# Altium PCB SolarPanelsV2_1.PcbDoc
Units mm, origin at the board's own origin, x right, y up, seen from the top; angles counter-clockwise.
Board outline 321.5 x 80 mm, 2 copper layers (Top Layer, Bottom Layer); 7 components, 5 nets, 37 pads, 25 vias.
Unrouted connection lines stored in the file: 3.
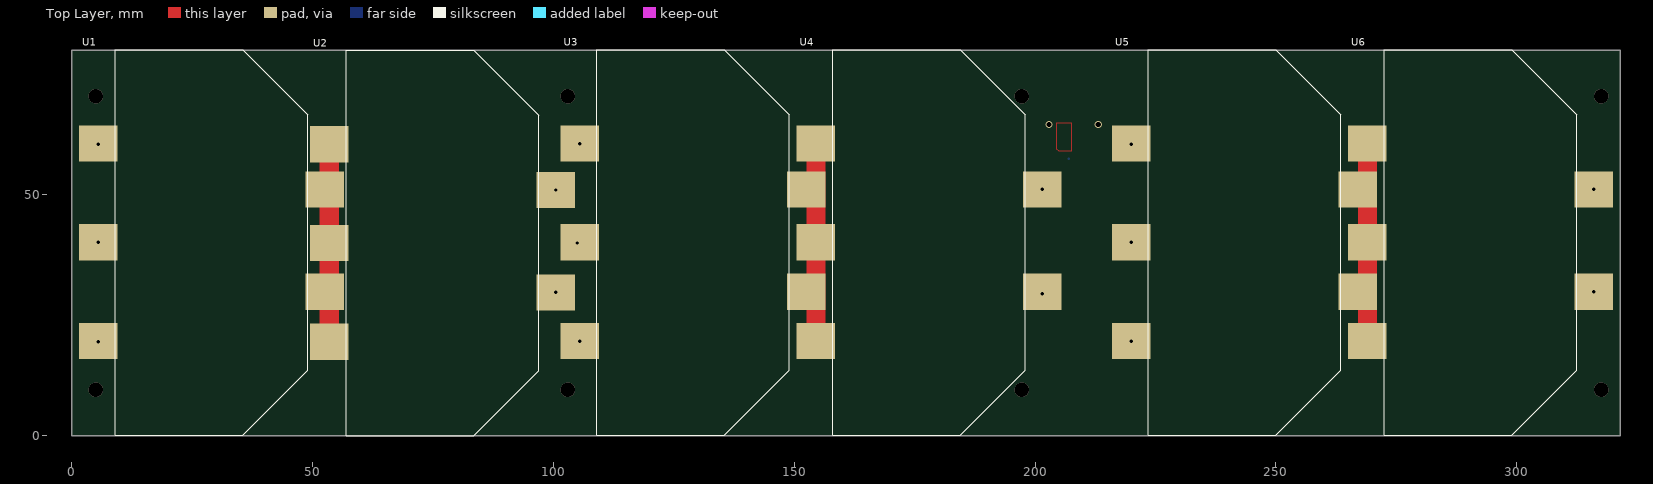
[diagram p0: Top Layer view]
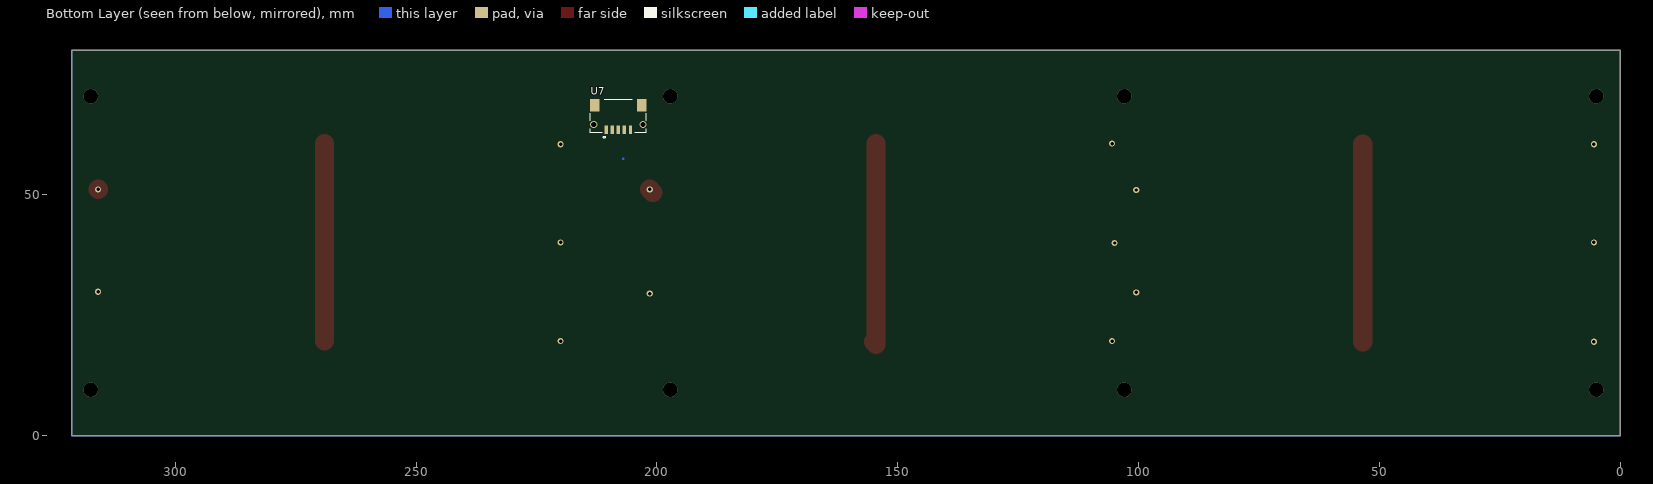
[diagram p1: Bottom Layer view, seen from below]

## Layer stack, top to bottom
Top Solder: solder mask 0.0102, Solder Resist, Dk 3.5
Top Layer: signal copper 0.0356
Dielectric 1: dielectric 0.32, FR-4, Dk 4.8
Bottom Layer: signal copper 0.0356
Bottom Solder: solder mask 0.0102, Solder Resist, Dk 3.5

## Board outline
0,0 0,80 321.5,80 321.5,0

## Design rules (kind name [scope] priority, off if disabled: settings)
Clearance [All] p1: gap=0.254 ignorepadtopadclearanceinfootprint=FALSE except(0: Arc-Hole Track-Hole SMDPad-Hole THPad-Hole Via-Hole Fill-Hole Poly-Hole Region-Hole Text-Hole)
ComponentClearance [All vs InComponent('No Component')] p1: gap=0 collisioncheckmode=3 verticalgap=0.254 showdistances=FALSE
PolygonConnect [All] p1: connectstyle=Relief reliefconductorwidth=0.254 reliefentries=4 polygonreliefangle="90 Angle" airgapwidth=0.254
RoutingVias [All] p1: holewidth=0.711 width=1.27 viastyle="Through Hole" minholewidth=0.711 minwidth=1.27 maxholewidth=0.711 maxwidth=1.27
SolderMaskExpansion [All] p1: expansion=0.102
Width [All] p1: maxlimit=10 minlimit=0.5 preferedwidth=4 toplayer_prefwidth=0.5 minimp=50.000000 maximp=50.000000 favimp=50.000000
29 further rules are at their usual default settings.

## Components (designator, comment, footprint, x,y, rotation, side; value= is the part's Value field where it differs from the comment)
U1 "SolarPanel-V2" SOLARPANEL_V2 9,0.127 r0 top
U2 "SolarPanel-V2" SOLARPANEL_V2 57,0 r0 top
U3 "SolarPanel-V2" SOLARPANEL_V2 109,0.127 r0 top
U4 "SolarPanel-V2" SOLARPANEL_V2 158,0.127 r0 top
U5 "SolarPanel-V2" SOLARPANEL_V2 223.5,0.127 r0 top
U6 "SolarPanel-V2" SOLARPANEL_V2 272.5,0.127 r0 top
U7 "DF14-5PinConnector" DF14-5P-1.25H(55) 208,63.5 r180 bottom

## Footprints (in the part's own frame and the unit in brackets; to place one, negate y for a bottom-side part, rotate by r counter-clockwise, add the part's x,y. Pads: shape width x height; smd on the part's side, far side on the other; paste and mask are expansions set on the pad)
DF14-5P-1.25H(55) [mm]
  rect 0.7x1.8 smd: 1(-2.5,0) 2(-1.25,0) 3(0,0) 4(1.25,0) 5(2.5,0)
  rect 2x2.6 smd: ""(-4.875,5.1) ""(4.875,5.1)
  silkscreen extent -5.81,-1.73 5.81,6.22
SOLARPANEL_V2 [mm] "Panels from Azurspace"
  rect 8x7.53 smd: 1(-3.5,60.5) 2(-3.5,40) 3(-3.5,19.5)
  rect 8x7.5 smd: 4(43.5,29.75) 5(43.5,51)
  silkscreen extent 0,0 40,80

## Via types
v1: diameter 1.27, hole 0.711, Top Layer to Bottom Layer, 15 vias
v2: diameter 3, hole 3, Top Layer to Bottom Layer, 8 vias
v3: diameter 1.5, hole 1.1, Top Layer to Bottom Layer, 2 vias

## Nets (pads, with @x,y where several pads share a name; then routed paths per layer and width w, separated by ;. In a path a pad name is that pad's centre, name@x,y a point inside that pad or via, vN(x,y) a via of type N, cw(c..) or ccw(c..) an arc to the next point about the centre after c; other vN are vias at no path point)
GND: U1.1 U1.2 U1.3 U3.1 U3.2 U3.3 U5.1 U5.2 U5.3 U7.1 U7.5
  other v1: 5.5,19.5 105.5,19.627 220,19.627 105,40 5.5,40.127 220,40.127 5.5,60.5 220,60.5 105.5,60.627
NetU1_4: U1.4 U1.5 U2.1 U2.2 U2.3 | length 41.1
  Top Layer w4: U2.3@53.5,19.627 U2.3 U2.1
NetU3_4: U3.4 U3.5 U4.1 U4.2 U4.3 | length 42.3
  Top Layer w4: U4.1 154.5,19 U4.3@155,19.5
NetU5_4: U5.4 U5.5 U6.1 U6.2 U6.3 | length 41
  Top Layer w4: U6.3 U6.1
VCC: U2.4 U2.5 U4.4 U4.5 U6.4 U6.5 U7.2 U7.3 U7.4 | length 0.9
  Top Layer w4: U4.5@200.873,50.5 v1(201.5,51.127)
  other v1: 201.5,29.5 100.5,29.75 316,29.877 100.5,51 316,51.127
pads on no net: U7.
copper on no net:
  other v2: 5,9.5 103,9.5 197.25,9.5 317.5,9.5 5,70.5 103,70.5 197.25,70.5 317.5,70.5
  other v3: 202.9,64.6 213.1,64.6

## Polygon pours and split planes (outlines as drawn)
no net on Top Layer "Ground Pour" (solid, shelved, pour order 4): 204.5,65 207.5,65 207.5,59 205,59 204.5,59.5
VCC on Top Layer "VCC Pour" (solid, shelved, pour order 0): 0,0 0,80 321.5,80 321.5,0
GND on Bottom Layer "Ground Pour" (solid, shelved, pour order 2): 0,0 0,80 321.5,80 321.5,0